# Altium PCB hep-0002-panel.PcbDoc
Units mm, origin at the board's own origin, x right, y up, seen from the top; angles counter-clockwise.
Board outline 120.4 x 43.4 mm, 4 copper layers (Top Layer, Signal_1, Signal_2, GND), stack 1.57 mm thick; 15 components, 0 nets, 15 pads, 0 vias.
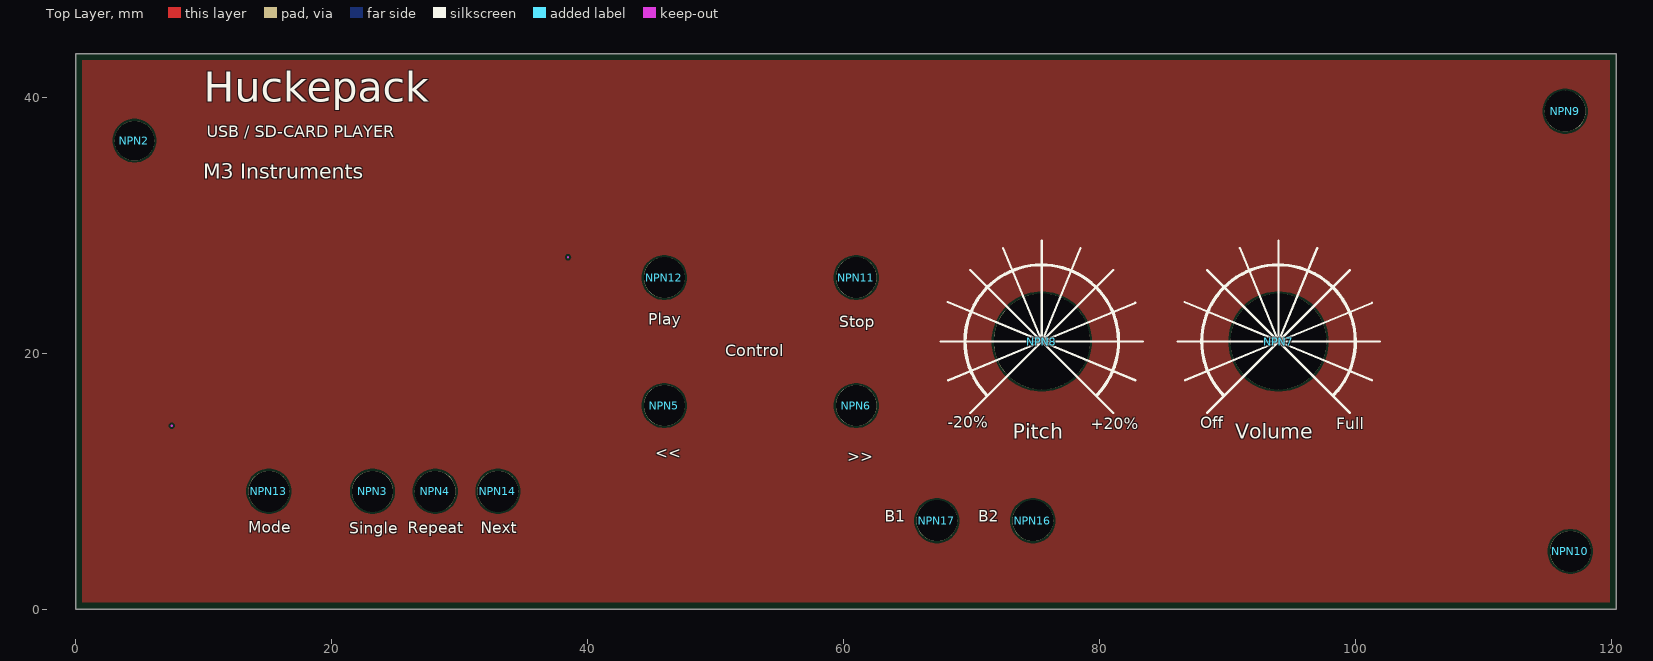
[diagram p0: Top Layer view]
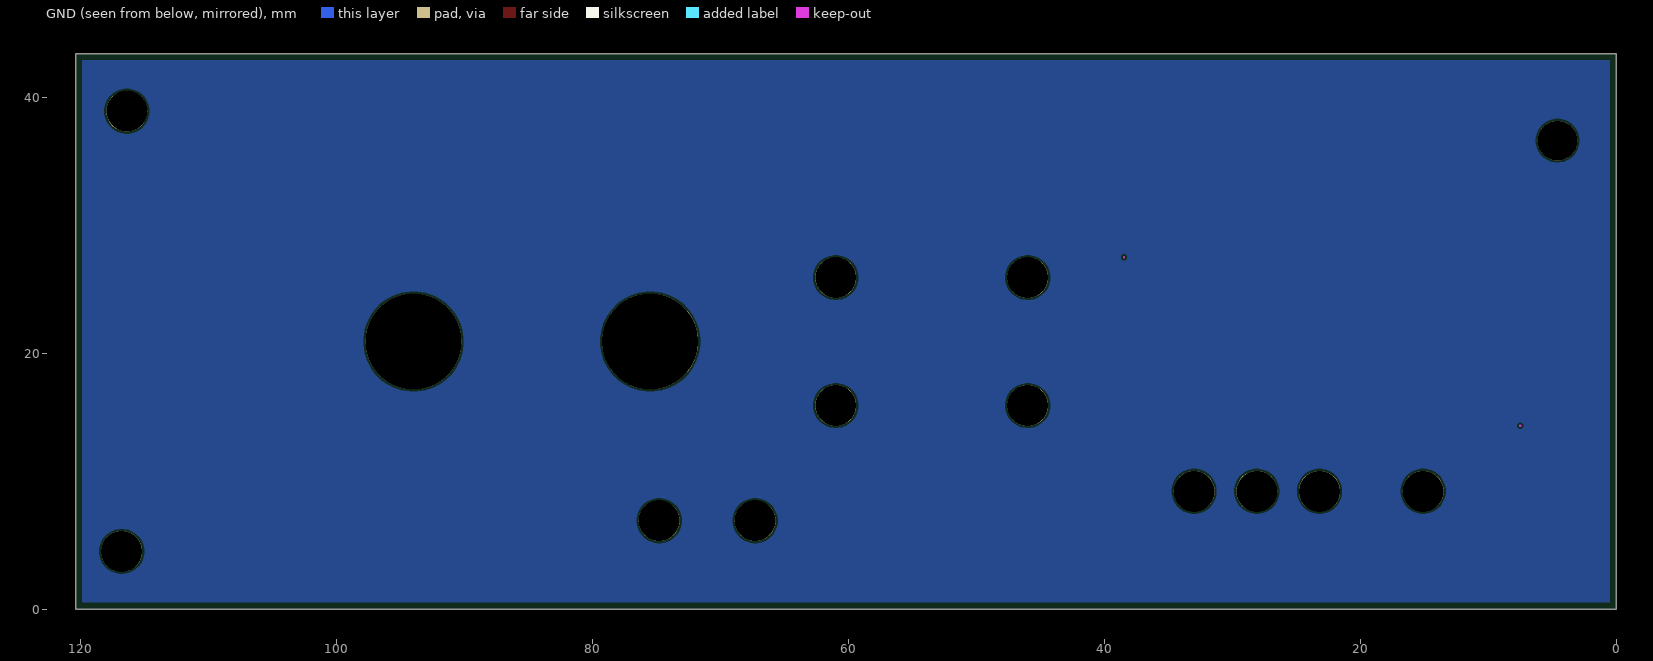
[diagram p1: GND view, seen from below]

## Layer stack, top to bottom
Top Solder: solder mask 0.0254, Solder Resist, Dk 3.5
Top Layer: signal copper 0.035
Dielectric 2: prepreg 0.2, PP-006, Dk 4.1
Signal_1: signal copper 0.0175
Dielectric 1: core 1.065, FR-4, Dk 4.6
Signal_2: signal copper 0.0175
Dielectric 3: prepreg 0.2, PP-006, Dk 4.1
GND: signal copper 0.035
Bottom Solder: solder mask 0.0254, Solder Resist, Dk 3.5

## Board outline
0,43.4 120.4,43.4 120.4,0 0,0 0,1.4

## Design rules (kind name [scope] priority, off if disabled: settings)
AssemblyTestPointUsage AssemblyTestPointUsage_1 [All] p2:
AssemblyTestpoint AssemblyTestpoint_1 [All] p2: testpointundercomponent=TRUE minsize=1.016 maxsize=2.54 preferedsize=1.524 minholesize=0 maxholesize=1.016 preferedholesize=0.813 testpointgrid=0.025 usegrid=TRUE gridtolerance=0 allowsidetop=TRUE allowsidebottom=TRUE
BoardOutlineClearance [All] p1: gap=0.5 ignorepadtopadclearanceinfootprint=FALSE
Clearance [All] p1: gap=0.15 ignorepadtopadclearanceinfootprint=FALSE
Clearance Clearance_1 [All] p2: gap=0.2 ignorepadtopadclearanceinfootprint=FALSE except(0: Arc-Hole Track-Hole SMDPad-Hole THPad-Hole Via-Hole Fill-Hole Poly-Hole Region-Hole Text-Hole)
ComponentClearance [All] p1 off: gap=0.254 collisioncheckmode=3 verticalgap=0.254 showdistances=FALSE
ComponentClearance ComponentClearance_1 [All] p2 off: gap=0.254 collisioncheckmode=3 verticalgap=0.254 showdistances=FALSE
DiffPairsRouting [All] p1: maxlimit=0.15 minlimit=0.15 mostfreqgap=0.15 toplayer_minwidth=0.25 toplayer_maxwidth=0.25 toplayer_prefwidth=0.25 midlayer1_minwidth=0.175 midlayer1_maxwidth=0.175 midlayer1_prefwidth=0.175 midlayer2_minwidth=0.175 midlayer2_maxwidth=0.175 midlayer2_prefwidth=0.175 bottomlayer_minwidth=0.25 bottomlayer_maxwidth=0.25 bottomlayer_prefwidth=0.25 impedanceprofiledriven=TRUE impedanceprofileid={04F2F82F-38AB-4D0A-8382-FEA7E611262D} impedanceprofilevalue=90.000000 maxuncoupledlength=12.7
FabricationTestPointUsage FabricationTestPointUsage_1 [All] p2: valid=0 allowmultiple=FALSE
FabricationTestpoint FabricationTestpoint_1 [All] p2: side=3 testpointundercomponent=TRUE minsize=1.016 maxsize=2.54 preferedsize=1.524 minholesize=0 maxholesize=1.016 preferedholesize=0.813 testpointgrid=0.025 allowsidetop=TRUE allowsidebottom=TRUE usegrid=TRUE gridtolerance=0
FanoutControl Fanout_LCC [IsLCC] p1: bgadir=Out bgaviamode=Centered fanoutstyle=Auto fanoutdirection=Alternating viagrid=0.025 // Fanout_LCC (Default Rule)
FanoutControl Fanout_BGA [IsBGA] p2: bgadir=Out bgaviamode=Centered fanoutstyle=Auto fanoutdirection=Alternating viagrid=0.025 // Fanout_BGA (Default Rule)
FanoutControl Fanout_Default [All] p4: bgadir=Out bgaviamode=Centered fanoutstyle=Auto fanoutdirection=Alternating viagrid=0.025 // Fanout_Default (Default Rule)
FanoutControl Fanout_Small [(CompPinCount < 5)] p5: bgadir=Out bgaviamode=Centered fanoutstyle=Auto fanoutdirection=OutThenIn viagrid=0.025 // Fanout_Small (Default Rule)
FanoutControl Fanout_BGA_1 [IsBGA] p6: bgadir=Out bgaviamode=Centered fanoutstyle=Auto fanoutdirection=Alternating viagrid=0.025 // Fanout_BGA (Default Rule)
FanoutControl Fanout_LCC_1 [IsLCC] p7: bgadir=Out bgaviamode=Centered fanoutstyle=Auto fanoutdirection=Alternating viagrid=0.025 // Fanout_LCC (Default Rule)
FanoutControl Fanout_SOIC_1 [IsSOIC] p8: bgadir=Out bgaviamode=Centered fanoutstyle=Auto fanoutdirection=Alternating viagrid=0.025 // Fanout_SOIC (Default Rule)
FanoutControl Fanout_Small_1 [(CompPinCount < 5)] p9: bgadir=Out bgaviamode=Centered fanoutstyle=Auto fanoutdirection=OutThenIn viagrid=0.025 // Fanout_Small (Default Rule)
FanoutControl Fanout_Default_1 [All] p10: bgadir=Out bgaviamode=Centered fanoutstyle=Auto fanoutdirection=Alternating viagrid=0.025 // Fanout_Default (Default Rule)
Height Height_1 [All] p2: minheight=0 maxheight=25.4 prefheight=12.7
HoleSize [All] p1 off: absolutevalues=TRUE maxlimit=2.54 minlimit=0.025 maxpercent=80.000 minpercent=20.000
HoleSize HoleSize_1 [All] p2: absolutevalues=TRUE maxlimit=6 minlimit=0.025 maxpercent=80.000 minpercent=20.000
HoleToHoleClearance [All] p1: gap=0.2 allowstackedmicrovias=TRUE
HoleToHoleClearance HoleToHoleClearance_1 [All] p2: gap=0.254 allowstackedmicrovias=TRUE
LayerPairs LayerPairs_1 [All] p2: enforce=TRUE
MinimumSolderMaskSliver MinimumSolderMaskSliver_1 [All] p1: minsoldermaskwidth=0.1
NetAntennae NetAntennae_1 [All] p2: netantennaetolerance=0
PasteMaskExpansion PasteMaskExpansion_1 [All] p2: expansion=0
PlaneClearance PlaneClearance_1 [All] p2: clearance=0.508
PlaneConnect PlaneConnect_1 [All] p2: planeconnectstyle=Relief reliefexpansion=50 reliefentries=4 reliefconductorwidth=2 reliefairgap=0.2
PlaneConnect Via [IsVia] p3: planeconnectstyle=Direct reliefexpansion=0.508 reliefentries=4 reliefconductorwidth=0.254 reliefairgap=0.254
PolygonConnect PolygonConnect_2 [OnLayer('Top Layer')] p1: thpad.connectstyle=Relief thpad.reliefconductorwidth=0.254 thpad.reliefentries=4 thpad.polygonreliefangle="90 Angle" thpad.airgapwidth=0.254 smdpad.connectstyle=NoConnect smdpad.reliefconductorwidth=0.254 smdpad.reliefentries=4 smdpad.polygonreliefangle="90 Angle" smdpad.airgapwidth=0.254 via.connectstyle=Relief via.reliefconductorwidth=0.254 via.reliefentries=4 via.polygonreliefangle="90 Angle" via.airgapwidth=0.254
PolygonConnect [All] p2: connectstyle=Relief reliefconductorwidth=0.254 reliefentries=4 polygonreliefangle="90 Angle" airgapwidth=0.254
PolygonConnect Polygon [IsVia] p3: connectstyle=Direct reliefconductorwidth=0.25 reliefentries=4 polygonreliefangle="90 Angle" airgapwidth=0.25
PolygonConnect PolygonConnect_1 [All] p4: connectstyle=Relief reliefconductorwidth=0.254 reliefentries=4 polygonreliefangle="90 Angle" airgapwidth=0.254
RoomDefinition Sheet1 [InComponentClass('Sheet1')] p1: confinementstyle=ConfineIn formatcopy=TRUE lockcomponents=FALSE outline -17.5,-81.6 33.3,-81.6 33.3,-56.2 -17.5,-56.2
RoutingCorners RoutingCorners_1 [All] p2: cornerstyle=45-Degree minsetback=2.54 maxsetback=2.54
RoutingLayers RoutingLayers_1 [All] p2: top layer_v5=TRUE mid layer 1_v5=TRUE mid layer 2_v5=TRUE bottom layer_v5=TRUE
RoutingPriority RoutingPriority_1 [All] p2: routingpriority=0
RoutingTopology RoutingTopology_1 [All] p2: topology=Shortest
RoutingVias [All] p1 off: holewidth=0.711 width=1.27 viastyle="Through Hole" minholewidth=0.711 minwidth=1.27 maxholewidth=0.711 maxwidth=1.27
RoutingVias RoutingVias_1 [All] p2: holewidth=0.3 width=0.5 viastyle="Through Hole" minholewidth=0.3 minwidth=0.5 maxholewidth=0.3 maxwidth=0.5
ShortCircuit ShortCircuit_1 [All] p2: allowed=FALSE
SilkToBoardRegionClearance SilkToBoardRegionClearance_1 [All] p2:
SilkToSilkClearance [All] p1 off: silktosilkclearance=0.254
SilkToSilkClearance SilkToSilkClearance_1 [All] p2 off: silktosilkclearance=0
SilkToSolderMaskClearance SilkToSolderMaskClearance_1 [IsPad] p2: minsilkscreentomaskgap=0.075 clearancetoexposedcopper=TRUE
SolderMaskExpansion [All] p1: expansion=0.102 istentingtop=FALSE
SolderMaskExpansion SolderMaskExpansion_1 [All] p2: expansion=0.05 istentingtop=FALSE
UnRoutedNet UnRoutedNet_1 [All] p2:
UnpouredPolygon UnpouredPolygon_1 [All] p2:
Width Width_1 [InNetClass('SD_CARD')] p1: maxlimit=0.35 minlimit=0.27 preferedwidth=0.35 toplayer_minwidth=0.35 midlayer1_maxwidth=0.27 midlayer1_prefwidth=0.27 midlayer2_maxwidth=0.27 midlayer2_prefwidth=0.27 bottomlayer_minwidth=0.35 impedanceprofiledriven=TRUE impedanceprofileid={81609BBF-65D0-4220-B192-4D64DA6867EA} impedanceprofilevalue=50.000000 minimp=50.000000 maximp=50.000000 favimp=50.000000
Width [All] p2: maxlimit=1 minlimit=0.15 preferedwidth=0.3 minimp=50.000000 maximp=50.000000 favimp=50.000000
20 further rules are at their usual default settings.

## Components (designator, comment, footprint, x,y, rotation, side; value= is the part's Value field where it differs from the comment)
NPN2 "NPN_3.1mm" HOLE_NPH_3.1_LED_3mm 4.6,36.6 r90 top
NPN3 "NPN_3.2mm" HOLE_NPH_3.2_M3#1 23.2,9.2 r90 top
NPN4 "NPN_3.2mm" HOLE_NPH_3.2_M3#1 28.1,9.2 r90 top
NPN5 "NPN_3.2mm" HOLE_NPH_3.2_M3#1 46,15.9 r90 top
NPN6 "NPN_3.2mm" HOLE_NPH_3.2_M3#2 61,15.657 r90 top
NPN7 "NPN_7.5mm" HOLE_NPH_7.5_F01#1 94,20.9 r0 top
NPN8 "NPN_7.5mm" HOLE_NPH_7.5_F01#2 75,20.9 r0 top
NPN9 "NPN_3.2mm" HOLE_NPH_3.2_M3#1 116.4,38.9 r90 top
NPN10 "NPN_3.2mm" HOLE_NPH_3.2_M3#1 116.8,4.5 r90 top
NPN11 "NPN_3.2mm" HOLE_NPH_3.2_M3#1 61,25.9 r90 top
NPN12 "NPN_3.2mm" HOLE_NPH_3.2_M3#1 46,25.9 r90 top
NPN13 "NPN_3.2mm" HOLE_NPH_3.2_M3#3 15.1,9.522 r90 top
NPN14 "NPN_3.2mm" HOLE_NPH_3.2_M3#1 33,9.2 r90 top
NPN16 "NPN_3.2mm" HOLE_NPH_3.2_M3#1 74.8,6.9 r90 top
NPN17 "NPN_3.2mm" HOLE_NPH_3.2_M3#1 67.3,6.9 r90 top

## Footprints (in the part's own frame and the unit in brackets; to place one, negate y for a bottom-side part, rotate by r counter-clockwise, add the part's x,y. Pads: shape width x height; smd on the part's side, far side on the other; paste and mask are expansions set on the pad)
HOLE_NPH_3.1_LED_3mm [mm]
  round 3.1 hole 3.1 unplated: 8(0,0)
HOLE_NPH_3.2_M3#1 [mm]
  round 3.2 hole 3.2 unplated: 8(0,0)
HOLE_NPH_3.2_M3#2 [mm]
  round 3.2 hole 3.2 unplated: 8(0.243,0)
HOLE_NPH_3.2_M3#3 [mm]
  round 3.2 hole 3.2 unplated: 8(-0.322,0)
HOLE_NPH_7.5_F01#1 [mm]
  round 7.5 hole 7.5 unplated: 1(0,0)
HOLE_NPH_7.5_F01#2 [mm]
  round 7.5 hole 7.5 unplated: 1(0.5,0)

## Part data
NPN2: library part NPH_3.1mm_LED_3mm
NPN3 NPN4 NPN5 NPN6 NPN9 NPN10 NPN11 NPN12 NPN13 NPN14 NPN16 NPN17: library part NPH_3.2mm_M3
NPN7 NPN8: library part NPH_7.5mm_F01

## Nets (pads, with @x,y where several pads share a name; then routed paths per layer and width w, separated by ;. In a path a pad name is that pad's centre, name@x,y a point inside that pad or via, vN(x,y) a via of type N, cw(c..) or ccw(c..) an arc to the next point about the centre after c; other vN are vias at no path point)
pads on no net: NPN2.8 NPN3.8 NPN4.8 NPN5.8 NPN6.8 NPN7.1 NPN8.1 NPN9.8 NPN10.8 NPN11.8 NPN12.8 NPN13.8 NPN14.8 NPN16.8 NPN17.8

## Polygon pours and split planes (outlines as drawn)
no net on Top Layer "NONET_L01_P000" (solid, pour order 0): 0,43.4 120.4,43.4 120.4,0 0,0 0,43.4
no net on GND "NONET_L04_P001" (solid, pour order 1): 0,43.4 120.4,43.4 120.4,0 0,0

## Keep-outs
Keep-Out Layer:
  lines w0.17: 7.515,14.315 7.515,14.315 ; 38.485,27.485 38.485,27.485

## Silkscreen, mask and mechanical layers (free items; w line width, h text height)
Top Overlay:
  lines w0.17: 67.594,20.9 75.5,20.9 ; 68.147,23.987 75.451,20.961 ; 68.196,17.875 75.5,20.9 ; 69.91,15.31 75.5,20.9 ; 69.91,26.49 75.5,20.9 ; 72.475,28.204 75.5,20.9 ; 75.5,28.806 75.5,20.9 ; 78.525,28.204 75.5,20.9 ; 81.09,15.31 75.5,20.9 ; 81.09,26.49 75.5,20.9 ; 82.804,17.875 75.5,20.9 ; 82.804,23.925 75.5,20.9 ; 83.406,20.9 75.5,20.9 ; 86.094,20.9 94,20.9 ; 86.647,23.987 93.951,20.961 ; 86.696,17.875 94,20.9 ; 88.41,15.31 94,20.9 ; 88.41,26.49 94,20.9 ; 90.975,28.204 94,20.9 ; 94,28.806 94,20.9 ; 97.025,28.204 94,20.9 ; 99.59,15.31 94,20.9 ; 99.59,26.49 94,20.9 ; 101.304,17.875 94,20.9 ; 101.304,23.925 94,20.9 ; 101.906,20.9 94,20.9
  lines w0.254: 71.239,16.676 cw(c75.5,20.9) 79.816,16.732 ; 89.739,16.676 cw(c94,20.9) 98.316,16.732
  text "Huckepack" at 10,38.861 h4
  text "USB / SD-CARD PLAYER" at 10.254,36.854 h0.9
  text "M3 Instruments" at 9.989,33.224 h2
  text "Play" at 44.733,21.886 h1.52
  text "Stop" at 59.656,21.698 h1.52
  text "Control" at 50.754,19.754 h0.9
  text "-20%" at 68.144,13.837 h1.52
  text "Off" at 87.901,13.817 h1.52
  text "+20%" at 79.317,13.737 h1.52
  text "Full" at 98.505,13.716 h1.52
  text "Pitch" at 73.236,12.92 h2
  text "Volume" at 90.601,12.92 h2
  text "<<" at 45.28,11.451 h1.52
  text ">>" at 60.28,11.208 h1.52
  text "B1" at 63.242,6.5 h1.52
  text "B2" at 70.552,6.5 h1.52
  text "Mode" at 13.473,5.638 h1.52
  text "Single" at 21.364,5.586 h1.52
  text "Repeat" at 25.961,5.603 h1.52
  text "Next" at 31.657,5.603 h1.52
Top Solder:
  drawing of 455 lines, arcs and shapes, not listed
  text "3" at 55.6,12.1 h3 r180
  text "3" at 51.401,9.1 h3
Outline:
  lines w0.1: 0,0 0,0 ; 0,0 120.4,0 120.4,43.4 ; 0,0 0,43.4 120.4,43.4 ; 7.515,14.315 7.515,27.485 38.485,27.485 ; 7.515,14.315 7.515,14.315 ; 7.515,14.315 38.485,14.315 38.485,27.485 ; 38.485,27.485 38.485,27.485 ; 120.4,43.4 120.4,43.4
  lines w0.17: 0,43.4 0,43.4
  lines w0.254: 0,43.4 0,43.4
Panel_DIM:
  lines w0.17: -1,0 1,0 0,0 ; 0,1 0,0 ; 3.6,36.6 5.6,36.6 4.6,36.6 ; 3.9,4.5 5.9,4.5 4.9,4.5 ; 4.6,37.6 4.6,36.6 ; 4.9,5.5 4.9,4.5 ; 6.515,14.315 8.515,14.315 7.515,14.315 ; 6.515,27.485 8.515,27.485 7.515,27.485 ; 7.515,15.315 7.515,14.315 ; 7.515,28.485 7.515,27.485 ; 14.1,9.2 16.1,9.2 15.1,8.878 ; 15.1,8.522 15.1,9.522 ; 22.2,9.2 24.2,9.2 23.2,9.2 ; 23.2,10.2 23.2,9.2 ; 27.1,9.2 29.1,9.2 28.1,9.2 ; 28.1,10.2 28.1,9.2 ; 32,9.2 34,9.2 33,9.2 ; 33,10.2 33,9.2 ; 37.485,14.315 39.485,14.315 38.485,14.315 ; 37.485,27.485 39.485,27.485 38.485,27.485 ; 38.485,15.315 38.485,14.315 ; 38.485,28.485 38.485,27.485 ; 45,15.9 47,15.9 46,15.9 ; 45,25.9 47,25.9 46,25.9 ; 46,16.9 46,15.9 ; 46,26.9 46,25.9 ; 60,15.9 62,15.9 61,15.9 ; 60,25.9 62,25.9 61,25.9 ; 61,16.9 61,15.9 ; 61,26.9 61,25.9 ; 66.3,6.9 68.3,6.9 67.3,6.9 ; 67.3,7.9 67.3,6.9 ; 73.8,6.9 75.8,6.9 74.8,6.9 ; 74.5,20.8 76.5,20.8 75.5,20.8 ; 74.8,7.9 74.8,6.9 ; 75.5,21.8 75.5,20.8 ; 93,20.9 95,20.9 94,20.9 ; 94,21.9 94,20.9 ; 115.4,38.9 117.4,38.9 116.4,38.9 ; 115.8,4.5 117.8,4.5 116.8,4.5 ; 116.4,39.9 116.4,38.9 ; 116.8,5.5 116.8,4.5 ; 0,0 0,-1 0,0 ; 4.6,36.6 4.6,35.6 4.6,36.6 ; 4.9,4.5 4.9,3.5 4.9,4.5 ; 7.515,14.315 7.515,13.315 7.515,14.315 ; 7.515,27.485 7.515,26.485 7.515,27.485 ; 15.1,8.878 15.1,8.2 15.1,8.878 ; 23.2,9.2 23.2,8.2 23.2,9.2 ; 28.1,9.2 28.1,8.2 28.1,9.2 ; 33,9.2 33,8.2 33,9.2 ; 38.485,14.315 38.485,13.315 38.485,14.315 ; 38.485,27.485 38.485,26.485 38.485,27.485 ; 46,15.9 46,14.9 46,15.9 ; 46,25.9 46,24.9 46,25.9 ; 61,15.9 61,14.9 61,15.9 ; 61,25.9 61,24.9 61,25.9 ; 67.3,6.9 67.3,5.9 67.3,6.9 ; 74.8,6.9 74.8,5.9 74.8,6.9 ; 75.5,20.8 75.5,19.8 75.5,20.8 ; 94,20.9 94,19.9 94,20.9 ; 116.4,38.9 116.4,37.9 116.4,38.9 ; 116.8,4.5 116.8,3.5 116.8,4.5
Drill Drawing:
  circle w0.254: c-34.278,219.293 r0.847
  lines w0.254: -35.124,210.827 -33.431,210.827 -33.431,212.52 -35.124,212.52 -35.124,210.827 ; -35.124,216.33 -33.431,216.33 -34.278,214.637 -35.124,216.33
  lines w0.381: -36.643,209.684 121.708,209.684 ; -36.643,221.114 121.708,221.114 ; -22.651,205.874 -22.651,224.924 ; -4.926,205.874 -4.926,224.924 ; 29.252,205.874 29.252,224.924 ; 42.101,205.874 42.101,224.924 ; 60.74,205.874 60.74,224.924 ; 89.738,205.874 89.738,224.924 ; -36.643,205.874 121.708,205.874 121.708,224.924 -36.643,224.924 -36.643,205.874
  text "Symbol" at -34.357,222.257 h1.83
  text "Hit Count" at -21.508,222.257 h1.83
  text "Finished Hole Size" at -3.783,222.257 h1.83
  text "Plated" at 30.395,222.257 h1.83
  text "Hole Type" at 43.244,222.257 h1.83
  text "Physical Length" at 61.883,222.257 h1.83
  text "Rout Path Length" at 90.881,222.257 h1.83
  text "1" at -21.508,218.447 h1.52
  text "3,100mm (122,05mil)" at -3.783,218.447 h1.52
  text "NPTH" at 30.395,218.447 h1.52
  text "Round" at 43.244,218.447 h1.52
  text "-" at 61.883,218.447 h1.52
  text "-" at 90.881,218.447 h1.52
  text "2" at -21.508,214.637 h1.52
  text "7,500mm (295,28mil)" at -3.783,214.637 h1.52
  text "NPTH" at 30.395,214.637 h1.52
  text "Round" at 43.244,214.637 h1.52
  text "-" at 61.883,214.637 h1.52
  text "-" at 90.881,214.637 h1.52
  text "12" at -21.508,210.827 h1.52
  text "3,200mm (125,98mil)" at -3.783,210.827 h1.52
  text "NPTH" at 30.395,210.827 h1.52
  text "Round" at 43.244,210.827 h1.52
  text "-" at 61.883,210.827 h1.52
  text "-" at 90.881,210.827 h1.52
  text "15 Total" at -21.508,207.017 h1.52

## Dimensions
0,0 to 116.8,4.5 on Courtyard Top
15.1,-0.375 to 0,0 on Courtyard Top
0,0 to 0,43.4 on Dimensions Top
0,43.4 to 120.4,43.4 on Dimensions Top